# Altium PCB quads.PcbDoc (part 2 of 2)
Units mil, origin at the board's own origin, x right, y up, seen from the top; angles counter-clockwise.
Board outline 3936.87 x 3936.87 mil, 2 copper layers (Top Layer, Bottom Layer); 52 components, 53 nets, 184 pads, 27 vias.
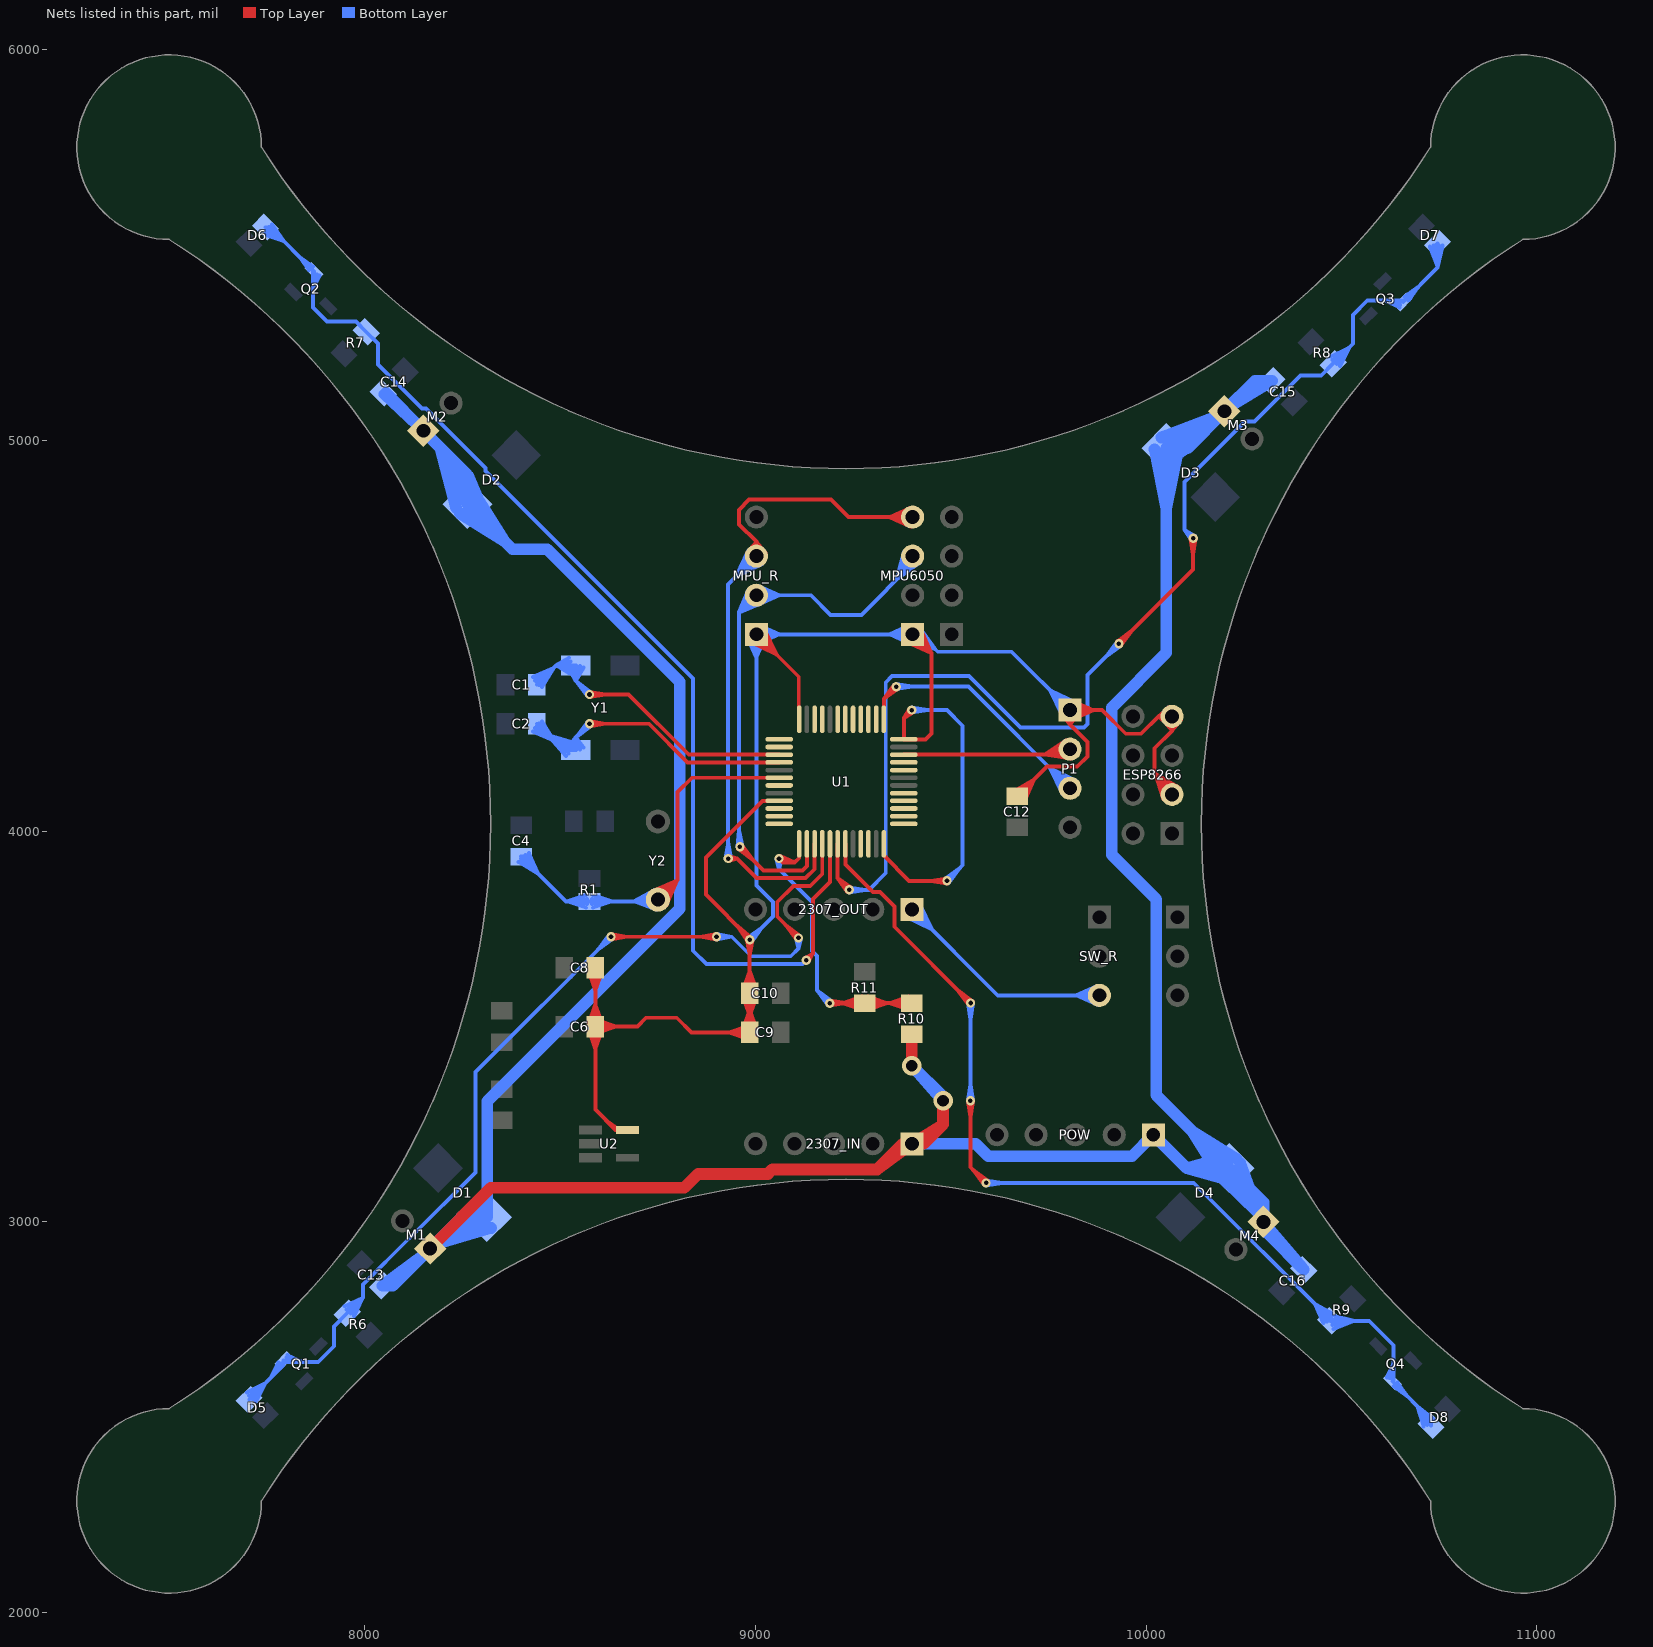
[diagram p2: the nets of this part, all layers, seen from the top]

## Via types
v1: diameter 23.62, hole 11.81, Top Layer to Bottom Layer, 24 vias
v2: diameter 50, hole 30, Top Layer to Bottom Layer, 3 vias

## Nets (pads, with @x,y where several pads share a name; then routed paths per layer and width w, separated by ;. In a path a pad name is that pad's centre, name@x,y a point inside that pad or via, vN(x,y) a via of type N, cw(c..) or ccw(c..) an arc to the next point about the centre after c; other vN are vias at no path point) (continued)
OSCOUT: C4.2 R1.1 U1.6 Y2.1 | length 2633.6
  Top Layer w10: Y2.1@8735.31,3846.45 8800,3875 ; Y2.1@8740.04,3837.52 8800,3875 ; Y2.1@8745.94,3829.42 8800,3875 ; Y2.1@8750,3825 8800,3875 ; Y2.1@8754.42,3820.94 8800,3875 ; Y2.1@8762.52,3815.04 8800,3875 ; Y2.1@8771.45,3810.31 8800,3875 ; U1.6@9060.55,4136.84 8836.84,4136.84 8800,4100 8800,3875
  Bottom Layer w10: C4.2@8393.79,3921.57 8443.71,3891.29 ; C4.2@8399.72,3929.68 8443.71,3891.29 ; C4.2@8400,3935 8514.53,3820.47 R1.1@8575,3820.47 8745.47,3820.47 Y2.1@8750,3825 8688.74,3820.47 ; C4.2@8405,3935 8443.71,3891.29 ; C4.2@8410.92,3939.6 8443.71,3891.29 ; C4.2@8419.69,3944.51 8443.71,3891.29 ; R1.1@8566.41,3804.04 8517.44,3820.47 ; R1.1@8566.41,3836.91 8517.44,3820.47 ; R1.1@8568.67,3813.83 8517.44,3820.47 ; R1.1@8568.67,3827.11 8517.44,3820.47 ; R1.1@8569.09,3820.47 8517.44,3820.47 ; R1.1@8580.91,3820.47 8632.56,3820.47 ; R1.1@8581.33,3813.83 8632.56,3820.47 ; R1.1@8581.33,3827.11 8632.56,3820.47 ; R1.1@8583.59,3804.04 8632.56,3820.47 ; R1.1@8583.59,3836.91 8632.56,3820.47 ; Y2.1@8742.64,3849.94 8688.74,3820.47 ; Y2.1@8746.39,3799.25 8688.74,3820.47 ; Y2.1@8746.75,3840.67 8688.74,3820.47 ; Y2.1@8749.09,3809.03 8688.74,3820.47 ; Y2.1@8749.27,3830.95 8688.74,3820.47 ; Y2.1@8750.15,3819 8688.74,3820.47
PA0: U1.10
PA1: U1.11
PA2: U1.12
PA3: R10.1 R11.2 U1.13 | length 1872.7
  Top Layer w10: v1@9058.9,3923.28 9100,3920 ; v1@9062.19,3936.45 9100,3920 ; U1.13@9111.73,3967.55 9111.73,3931.73 9100,3920 ; v1(9190,3560) R11.2@9280,3560 R10.1@9400,3560 ; v1@9190.55,3553.21 9231.81,3560 v1@9190.55,3566.79 ; R11.2@9272.08,3542.74 9222.5,3560 ; R11.2@9272.08,3577.26 9222.5,3560 ; R11.2@9274.46,3552.52 9222.5,3560 ; R11.2@9274.46,3567.48 9222.5,3560 ; R11.2@9275,3560 9222.5,3560 ; R11.2@9285,3560 9337.5,3560 ; R11.2@9285.54,3552.52 9337.5,3560 ; R11.2@9285.54,3567.48 9337.5,3560 ; R11.2@9287.92,3542.74 9337.5,3560 ; R11.2@9287.92,3577.26 9337.5,3560 ; R10.1@9392.08,3542.74 9342.5,3560 ; R10.1@9392.08,3577.26 9342.5,3560 ; R10.1@9394.46,3552.52 9342.5,3560 ; R10.1@9394.46,3567.48 9342.5,3560 ; R10.1@9395,3560 9342.5,3560 ; 9100,3920 9070,3920 v1(9060,3930) 9100,3920
  Bottom Layer w10: v1@9053.24,3929.14 9060,3902.97 ; v1(9060,3930) 9060,3902.97 ; v1@9066.76,3929.14 9060,3902.97 ; v1@9184.85,3555.55 9156.98,3593.03 v1@9194.45,3565.15 ; v1(9190,3560) 9156.81,3593.19 9156.81,3681.11 9144.53,3693.39 9144.53,3818.44 9060,3902.97
PA6: D5.1 Q1.2 R6.2 U1.16 | length 3915.2
  Top Layer w10: v1(8630,3730) v1(8900,3730) 8858.19,3730 ; v1@8630.55,3723.21 8671.81,3730 v1@8630.55,3736.79 ; v1@8899.45,3723.21 8858.19,3730 ; v1@8899.45,3736.79 8858.19,3730 ; v1@9104.85,3722.58 9076.98,3760.05 ; v1@9114.45,3732.18 9076.98,3760.05 ; U1.16@9170.79,3967.55 9170.79,3890.79 9140,3860 9097.03,3860 9055.47,3818.44 9055.47,3781.56 v1(9110,3727.03) 9076.98,3760.05
  Bottom Layer w10: D5.1@7698.57,2563.58 7744.82,2586.58 ; D5.1@7703.9,2555.05 7744.82,2586.58 ; D5.1@7704.12,2545.88 7792.23,2633.99 Q1.2@7792.23,2645.13 7795.4,2641.96 7880.85,2641.96 7920.68,2681.79 7920.68,2732.25 R6.2@7954.72,2766.28 7994.93,2806.5 ; D5.1@7708.3,2550.06 7744.82,2586.58 ; D5.1@7713.29,2545.66 7744.82,2586.58 ; D5.1@7721.82,2540.33 7744.82,2586.58 ; Q1.2@7778.69,2640.9 7759.61,2601.37 ; Q1.2@7784.58,2637.47 7759.61,2601.37 ; Q1.2@7789.86,2633.18 7759.61,2601.37 ; Q1.2@7798.62,2646.09 7838.62,2641.96 ; Q1.2@7799.89,2652.78 7838.62,2641.96 ; Q1.2@7802.27,2659.16 7838.62,2641.96 ; R6.2@7948.14,2784.1 7994.93,2806.5 ; R6.2@7953.35,2775.49 7994.93,2806.5 ; R6.2@7958.25,2769.82 7994.93,2806.5 ; R6.2@7963.92,2764.91 7994.93,2806.5 ; R6.2@7972.54,2759.71 7994.93,2806.5 ; v1@8624.85,3734.45 8596.98,3696.98 ; v1@8634.45,3724.85 8596.98,3696.98 ; v1(8900,3730) 8939.08,3730 ; v1@8900.59,3723.21 8939.08,3730 ; v1@8900.59,3736.79 8939.08,3730 ; v1@9103.24,3726.17 9110,3700 ; v1@9116.76,3726.17 9110,3700 ; 7994.93,2806.5 7994.93,2839.39 8113.72,2958.18 8114.73,2958.18 8283.33,3126.77 8283.33,3383.33 v1(8630,3730) 8596.98,3696.98 ; 8939.08,3730 8989.08,3680 9090,3680 9110,3700 ; 9110,3700 v1(9110,3727.03) 9110,3700
PA7: D6.1 Q2.2 R7.2 U1.17 | length 3554.7
  Top Layer w10: v1@9125.91,3675.45 9147,3687 ; v1(9130,3670) 9147,3687 ; v1@9135.45,3665.91 9147,3687 ; U1.17@9190.47,3967.55 9190.47,3870.47 9147,3827 9147,3687
  Bottom Layer w10: D6.1@7742.36,5526.94 7792.9,5509.99 ; D6.1@7745.88,5545.88 7757.01,5545.88 Q2.2@7870.13,5432.77 7866.96,5429.6 7866.96,5340.61 7903.25,5304.32 7977.25,5304.32 R7.2@8003.28,5278.28 8033.64,5247.93 8033.64,5194.9 8146.78,5081.76 8156.21,5081.76 8308.61,4929.36 8308.61,4922.43 8840,4391.04 8840,4381 8840,4379 8840,3694 8874,3660 9120,3660 v1(9130,3670) ; D6.1@7746.44,5536.12 7792.9,5509.99 ; D6.1@7750.06,5541.7 7792.9,5509.99 ; D6.1@7754.34,5546.79 7792.9,5509.99 ; D6.1@7761.93,5553.38 7792.9,5509.99 ; Q2.2@7857.28,5436.01 7832.91,5469.99 ; Q2.2@7862.47,5440.42 7832.91,5469.99 ; Q2.2@7866.88,5445.61 7832.91,5469.99 ; Q2.2@7871.09,5426.38 7866.96,5386.36 ; Q2.2@7877.78,5425.11 7866.96,5386.36 ; Q2.2@7884.17,5422.73 7866.96,5386.36
PA8: U1.29
PA11: U1.32
PA12: U1.33
PA15: U1.38
PB0: D7.1 Q3.2 R8.2 U1.18 | length 4446.4
  Top Layer w10: U1.18@9210.16,3967.55 9210.16,3879.84 9210.47,3879.53 ; v1@9234.81,3845.59 9210.47,3879.53 ; v1@9244.41,3855.19 9210.47,3879.53 ; v1@9925.55,4485.15 9963.02,4513.02 v1@9935.15,4475.55 ; v1(9930,4480) 10120,4670 v1(10120,4750) ; v1@10113.21,4749.45 10120,4708.19 v1@10126.79,4749.45 ; 9210.47,3879.53 v1(9240,3850) 9210.47,3879.53
  Bottom Layer w10: v1(9240,3850) 9290,3850 9333.19,3893.19 9333.19,4381.11 9348.89,4396.81 9546.47,4396.81 9677.81,4265.47 9840.74,4265.47 9849.53,4274.26 9849.53,4399.53 v1(9930,4480) 9896.98,4446.98 ; v1@9240.55,3843.21 9281.81,3850 v1@9240.55,3856.79 ; v1@9924.85,4484.45 9896.98,4446.98 ; v1@9934.45,4474.85 9896.98,4446.98 ; v1@10114.69,4745.73 10097.61,4772.39 ; v1@10124.27,4755.31 10097.61,4772.39 ; R8.2@10471.68,5214.52 10518.94,5237.37 ; R8.2@10476.91,5205.92 10518.94,5237.37 ; R8.2@10481.82,5200.25 10518.94,5237.37 ; R8.2@10487.49,5195.34 10518.94,5237.37 ; R8.2@10496.08,5190.11 10518.94,5237.37 ; Q3.2@10647.73,5340.83 10611.36,5358.04 ; Q3.2@10650.11,5347.22 10611.36,5358.04 ; Q3.2@10651.38,5353.91 10611.36,5358.04 ; Q3.2@10661.01,5367.72 10694.99,5392.09 ; Q3.2@10665.42,5362.53 10694.99,5392.09 ; Q3.2@10670.61,5358.12 10694.99,5392.09 ; D7.1@10725.46,5496.29 10745.88,5443.5 ; D7.1@10735.11,5499.06 10745.88,5443.5 ; D7.1@10741.7,5499.94 10745.88,5443.5 ; D7.1@10745.88,5504.12 10745.88,5442.99 Q3.2@10657.77,5354.87 10654.6,5358.04 10565.61,5358.04 10529.32,5321.75 10529.32,5247.75 R8.2@10478.28,5196.72 10447.93,5166.36 10394.9,5166.36 10277.35,5048.82 10252.27,5048.82 10097.61,4894.16 10097.61,4772.39 ; D7.1@10748.36,5500.04 10745.88,5443.5 ; D7.1@10758.31,5498.72 10745.88,5443.5 ; 10097.61,4772.39 v1(10120,4750) 10097.61,4772.39
PB1: D8.1 Q4.2 R9.2 U1.19 | length 4258.4
  Top Layer w10: U1.19@9229.84,3967.55 9229.84,3915.16 9300.47,3844.53 9318.44,3844.53 9355.47,3807.5 9355.47,3755.47 v1(9550.47,3560.47) ; v1@9543.21,3309.45 9550,3268.19 ; v1@9545.32,3556.02 9517.45,3593.5 v1@9554.92,3565.63 ; v1@9556.79,3309.45 9550,3268.19 ; v1@9584.85,3095.55 9556.98,3133.02 ; v1@9594.45,3105.15 9556.98,3133.02 ; 9550,3268.19 v1(9550,3310) 9550,3150 9550,3140 v1(9590,3100) 9556.98,3133.02
  Bottom Layer w10: v1@9543.22,3310.63 9550.47,3351.82 ; v1@9543.68,3559.92 9550.47,3518.66 ; v1@9556.79,3310.48 9550.47,3351.82 ; v1@9557.26,3559.92 9550.47,3518.66 ; v1(9590,3100) 10121.55,3100 10471.72,2749.84 R9.2@10471.72,2746.72 10570.71,2746.72 10633.04,2684.39 10633.04,2595.4 Q4.2@10629.87,2592.23 10729.12,2492.99 D8.1@10729.12,2479.12 ; v1@9590.55,3093.21 9631.81,3100 v1@9590.55,3106.79 ; R9.2@10453.51,2740.71 10432.56,2789 ; R9.2@10462.31,2745.58 10432.56,2789 ; R9.2@10468.18,2750.25 10432.56,2789 ; R9.2@10473.33,2755.71 10432.56,2789 ; R9.2@10475.25,2743.18 10533.54,2746.72 ; R9.2@10475.28,2750.68 10533.54,2746.72 ; R9.2@10476.19,2735.74 10533.54,2746.72 ; R9.2@10476.82,2760.61 10533.54,2746.72 ; R9.2@10478.92,2726.07 10533.54,2746.72 ; R9.2@10478.91,2764.07 10432.56,2789 ; Q4.2@10615.83,2602.27 10633.04,2638.64 ; Q4.2@10622.22,2599.89 10633.04,2638.64 ; Q4.2@10628.91,2598.62 10633.04,2638.64 ; Q4.2@10633.12,2579.39 10667.09,2555.01 ; Q4.2@10637.53,2584.58 10667.09,2555.01 ; Q4.2@10642.72,2588.99 10667.09,2555.01 ; D8.1@10709.95,2476.06 10694.14,2527.97 ; D8.1@10719.25,2479.86 10694.14,2527.97 ; D8.1@10724.94,2483.3 10694.14,2527.97 ; D8.1@10730.18,2487.4 10694.14,2527.97 ; D8.1@10737.04,2494.74 10694.14,2527.97 ; 9550.47,3351.82 v1(9550,3310) 9550.47,3310.47 v1(9550.47,3560.47) 9550.47,3518.66
PB3: U1.39
PB4: U1.40
PB5: U1.41
PB6: U1.42
PB7: U1.43
PB8: U1.45
PB9: U1.46
PB10: U1.21
PB11: U1.22
PB12: U1.25
PB13: U1.26
PB14: U1.27
PB15: U1.28
PC13: U1.2
PC14: C1.2 U1.3 Y1.2 | length 1665.3
  Top Layer w10: v1(8575,4350) 8675,4350 8829.1,4195.9 U1.3@9060.55,4195.9 ; v1@8575.55,4343.21 8616.81,4350 v1@8575.55,4356.79
  Bottom Layer w10: C1.2@8430.49,4394.69 8483.71,4418.71 ; C1.2@8435.4,4385.92 8483.71,4418.71 ; C1.2@8440,4375 8489.27,4424.27 ; C1.2@8440,4380 8483.71,4418.71 ; C1.2@8445.32,4374.72 8483.71,4418.71 ; C1.2@8453.43,4368.79 8483.71,4418.71 ; Y1.2@8520.14,4418.87 8540.01,4384.99 ; Y1.2@8522.75,4404.41 8489.27,4424.27 ; Y1.2@8522.75,4444.13 8489.27,4424.27 ; Y1.2@8526.75,4413.78 8489.27,4424.27 ; Y1.2@8526.75,4434.76 8489.27,4424.27 ; Y1.2@8528.19,4424.27 8489.27,4424.27 ; Y1.2@8529.51,4422.84 8540.01,4384.99 ; Y1.2@8550.5,4422.84 8540.01,4384.99 ; Y1.2@8559.88,4418.87 8540.01,4384.99 ; v1@8569.85,4345.55 8541.98,4383.02 ; v1@8579.45,4355.15 8541.98,4383.02 ; 8489.27,4424.27 Y1.2@8540.01,4424.27 ; 8540.01,4384.99 Y1.2@8540.01,4424.27 ; 8540.01,4384.99 v1(8575,4350) 8541.98,4383.02 ; 8540.01,4384.99 Y1.2@8540.01,4424.27
PC15: C2.2 U1.4 Y1.1 | length 1693.8
  Top Layer w10: v1(8575,4275) 8727.42,4275 8826.21,4176.21 U1.4@9060.55,4176.21 ; v1@8575.55,4268.21 8616.81,4275 v1@8575.55,4281.79
  Bottom Layer w10: C2.2@8430.49,4255.31 8483.71,4231.29 ; C2.2@8435.4,4264.08 8483.71,4231.29 ; C2.2@8440,4270 8483.71,4231.29 ; C2.2@8440,4275 8507.27,4207.73 Y1.1@8540.01,4207.73 8540.01,4240.01 ; C2.2@8445.32,4275.28 8483.71,4231.29 ; C2.2@8453.43,4281.21 8483.71,4231.29 ; Y1.1@8514.59,4192.27 8467.96,4247.04 ; Y1.1@8520.49,4214.3 8540.01,4240.01 ; Y1.1@8521.77,4199.31 8467.96,4247.04 ; Y1.1@8528.2,4207.73 8467.96,4247.04 ; Y1.1@8529.56,4209.47 8540.01,4240.01 ; Y1.1@8533.32,4217 8467.96,4247.04 ; Y1.1@8536.87,4226.41 8467.96,4247.04 ; Y1.1@8550.45,4209.47 8540.01,4240.01 ; Y1.1@8559.52,4214.3 8540.01,4240.01 ; v1@8569.85,4279.45 8541.98,4241.98 v1@8579.45,4269.85 ; v1(8575,4275) 8540.01,4240.01
RESET: U1.7
SCL: MPU6050.3 MPU_R.2 U1.14 | length 2487.1
  Top Layer w10: v1@8955.55,3954.85 8993.02,3926.98 v1@8965.15,3964.45 ; v1(8960,3960) 9020,3900 9120,3900 9131.42,3911.42 U1.14@9131.42,3967.55
  Bottom Layer w10: v1@8953.19,3960.14 8957.47,4002.14 ; v1@8966.74,3960.95 8957.47,4002.14 ; MPU_R.2@8981.61,4617.63 8957.47,4559.47 ; MPU_R.2@8990.61,4613.02 8957.47,4559.47 ; MPU_R.2@9003.77,4589.58 9061.53,4604 ; MPU_R.2@9003.77,4618.42 9061.53,4604 ; MPU_R.2@9007.05,4580 9061.53,4604 ; MPU_R.2@9007.05,4628 9061.53,4604 ; MPU_R.2@9011.02,4592.61 8957.47,4559.47 ; MPU_R.2@9015.63,4583.61 8957.47,4559.47 ; MPU6050.3@9379.72,4714.25 9361.01,4644.21 ; MPU6050.3@9389.26,4710.97 9361.01,4644.21 ; MPU6050.3@9413.1,4694.63 9361.01,4644.21 ; MPU6050.3@9419.59,4686.91 9361.01,4644.21 ; 8957.47,4002.14 v1(8960,3960) 8957.47,3962.53 8957.47,4559.47 ; 8957.47,4559.47 MPU_R.2@9002,4604 9142.2,4604 9192.33,4553.87 9270.67,4553.87 9402,4685.2 MPU6050.3@9402,4704 9361.01,4644.21
SDA: MPU6050.4 MPU_R.3 U1.15 | length 2531.8
  Top Layer w10: v1(8930,3930) 8952.08,3930 ; v1@8931.05,3923.27 8952.08,3930 ; v1@8931.05,3936.73 8952.08,3930 ; MPU_R.3@8978.86,4712.12 9002,4741.03 ; MPU_R.3@8987.75,4706.85 9002,4741.03 ; MPU_R.3@9002,4704 9002,4741.03 ; MPU_R.3@9016.25,4706.85 9002,4741.03 ; MPU_R.3@9025.14,4712.12 9002,4741.03 ; U1.15@9151.1,3967.55 9151.1,3903.45 9151.42,3903.13 9128.28,3880 9002.08,3880 8952.08,3930 ; MPU6050.4@9396.95,4780 9342.47,4804 ; MPU6050.4@9396.95,4828 9342.47,4804 ; MPU6050.4@9400.23,4789.58 9342.47,4804 ; MPU6050.4@9400.23,4818.42 9342.47,4804 ; MPU6050.4@9402,4804 9237.92,4804 9193.4,4848.53 8983.56,4848.53 8957.47,4822.44 8957.47,4785.56 9002,4741.03
  Bottom Layer w10: v1@8923.21,3930.55 8930,3971.81 v1@8936.79,3930.55 ; v1(8930,3930) 8930,4632 MPU_R.3@9002,4704 ; MPU_R.3@8981.95,4718.12 8951.26,4653.26 ; MPU_R.3@8990.74,4713.18 8951.26,4653.26 ; MPU_R.3@9011.18,4692.74 8951.26,4653.26 ; MPU_R.3@9016.12,4683.95 8951.26,4653.26
SW: 2307_OUT.1 SW_R.3 | length 1096.3
  Bottom Layer w10: 2307_OUT.1@9385.88,3779.95 9450.74,3749.26 ; 2307_OUT.1@9390.82,3788.74 9450.74,3749.26 ; 2307_OUT.1@9400,3800 9620,3580 SW_R.3@9880,3580 ; 2307_OUT.1@9411.26,3809.18 9450.74,3749.26 ; 2307_OUT.1@9420.05,3814.12 9450.74,3749.26 ; SW_R.3@9874.95,3556 9820.47,3580 ; SW_R.3@9874.95,3604 9820.47,3580 ; SW_R.3@9878.23,3565.58 9820.47,3580 ; SW_R.3@9878.23,3594.42 9820.47,3580
SWCLK: P1.3 U1.37 | length 1154.7
  Top Layer w10: U1.37@9328.27,4286.45 9328.27,4338.27 ; v1@9354.83,4374.44 9328.27,4338.27 ; v1@9364.44,4364.83 9328.27,4338.27 ; 9328.27,4338.27 v1(9360,4370) 9328.27,4338.27
  Bottom Layer w10: v1(9360,4370) 9545,4370 P1.3@9805,4110 ; v1@9360.55,4363.21 9401.81,4370 v1@9360.55,4376.79 ; P1.3@9784.95,4095.88 9754.26,4160.74 ; P1.3@9793.74,4100.82 9754.26,4160.74 ; P1.3@9814.18,4121.26 9754.26,4160.74 ; P1.3@9819.12,4130.05 9754.26,4160.74
SWIO: P1.2 U1.34 | length 760.8
  Top Layer w10: U1.34@9379.45,4195.9 9790.9,4195.9 P1.2@9805,4210 9740.65,4195.9 ; P1.2@9795.38,4232.56 9740.65,4195.9 ; P1.2@9800.34,4223.76 9740.65,4195.9 ; P1.2@9805.7,4185.48 9740.65,4195.9 ; P1.2@9806.53,4195.55 9740.65,4195.9
VBAT: U1.1
VCC3V3: C6.2 C8.2 C9.2 C10.2 C12.2 ESP8266.3 ESP8266.7 MPU6050.1 MPU_R.1 P1.1 U1.9 U1.24 U1.36 U1.48 U2.5 | length 11797.7
  Top Layer w10: C6.2@8572.74,3492.08 8590,3442.5 ; C6.2@8572.74,3507.92 8590,3557.5 ; C8.2@8572.74,3642.08 8590,3592.5 ; C6.2@8582.52,3494.46 8590,3442.5 ; C6.2@8582.52,3505.54 8590,3557.5 ; C8.2@8582.52,3644.46 8590,3592.5 ; C6.2@8590,3495 8590,3442.5 ; C6.2@8590,3505 8590,3557.5 ; C8.2@8590,3645 8590,3592.5 ; C8.2@8590,3650 C6.2@8590,3500 ; C6.2@8590.54,3492.52 8642.5,3500 ; C6.2@8590.54,3507.48 8642.5,3500 ; C6.2@8592.92,3482.74 8642.5,3500 ; C6.2@8592.92,3517.26 8642.5,3500 ; C6.2@8597.48,3494.46 8590,3442.5 ; C6.2@8597.48,3505.54 8590,3557.5 ; C8.2@8597.48,3644.46 8590,3592.5 ; C6.2@8607.26,3492.08 8590,3442.5 ; C6.2@8607.26,3507.92 8590,3557.5 ; C8.2@8607.26,3642.08 8590,3592.5 ; 8618.21,3259.17 U2.5@8652.56,3235.43 ; U2.5@8672.24,3235.43 8641.94,3235.43 ; C9.2@8967.74,3492.92 8985,3542.5 ; C10.2@8967.74,3577.08 8985,3527.5 ; C10.2@8967.74,3592.92 8985,3642.5 ; C9.2@8977.52,3490.54 8985,3542.5 ; C10.2@8977.52,3579.46 8985,3527.5 ; C10.2@8977.52,3590.54 8985,3642.5 ; v1@8978.21,3721.45 8985,3680.19 ; v1@8979.59,3717.86 8953.99,3756.96 ; C9.2@8982.08,3467.74 8932.5,3485 ; C9.2@8982.08,3502.26 8932.5,3485 ; C9.2@8984.46,3477.52 8932.5,3485 ; C9.2@8984.46,3492.48 8932.5,3485 ; C9.2@8985,3490 8985,3542.5 ; C10.2@8985,3580 8985,3527.5 ; C10.2@8985,3590 8985,3642.5 ; MPU_R.1@8987.88,4483.95 9052.74,4453.26 ; v1@8989.75,3726.88 8953.99,3756.96 ; v1@8991.79,3721.45 8985,3680.19 ; C9.2@8992.48,3490.54 8985,3542.5 ; C10.2@8992.48,3579.46 8985,3527.5 ; C10.2@8992.48,3590.54 8985,3642.5 ; MPU_R.1@8992.82,4492.74 9052.74,4453.26 ; MPU_R.1@9002,4504 9110.51,4395.49 9110.51,4286.45 U1.48@9111.73,4286.45 ; C9.2@9002.26,3492.92 8985,3542.5 ; C10.2@9002.26,3577.08 8985,3527.5 ; C10.2@9002.26,3592.92 8985,3642.5 ; MPU_R.1@9013.26,4513.18 9052.74,4453.26 ; MPU_R.1@9022.05,4518.12 9052.74,4453.26 ; U1.9@9060.55,4077.79 9017.79,4077.79 8873.19,3933.19 8873.19,3837.76 8985,3725.94 v1(8985,3722) ; U1.24@9328.27,3967.55 9328.27,3937.73 9393,3873 v1(9490,3873) ; MPU6050.1@9388.08,4483.81 9450,4456 ; MPU6050.1@9392.89,4492.69 9450,4456 ; v1@9394.65,4314.22 9379.45,4289.45 ; v1(9400,4310) 9379.45,4289.45 ; MPU6050.1@9402,4504 9450,4456 ; v1@9404.22,4304.65 9379.45,4289.45 ; MPU6050.1@9413.31,4513.11 9450,4456 ; MPU6050.1@9422.19,4517.92 9450,4456 ; v1@9489.45,3866.21 9448.19,3873 v1@9489.45,3879.79 ; C12.2@9663.79,4103.43 9713.71,4133.71 ; C12.2@9669.72,4095.32 9713.71,4133.71 ; C12.2@9670,4090 9745.47,4165.47 9823.44,4165.47 9849.53,4191.56 9849.53,4228.44 9805,4272.97 ; C12.2@9675,4090 9713.71,4133.71 ; C12.2@9680.92,4085.4 9713.71,4133.71 ; C12.2@9689.69,4080.49 9713.71,4133.71 ; P1.1@9781.86,4301.88 9805,4272.97 ; P1.1@9790.75,4307.15 9805,4272.97 ; P1.1@9806.77,4295.58 9864.53,4310 ; P1.1@9806.77,4324.42 9864.53,4310 ; P1.1@9810.05,4286 9864.53,4310 ; P1.1@9810.05,4334 9864.53,4310 ; P1.1@9819.25,4307.15 9805,4272.97 ; P1.1@9828.14,4301.88 9805,4272.97 ; ESP8266.7@10042.86,4285.88 10066,4256.97 ; ESP8266.3@10044.37,4082.43 10023.49,4147.45 ; ESP8266.7@10051.75,4291.15 10066,4256.97 ; ESP8266.3@10053.73,4086.22 10023.49,4147.45 ; ESP8266.7@10057.33,4271.06 10031.31,4294 ; ESP8266.7@10057.33,4316.94 10031.31,4294 ; ESP8266.7@10062.96,4279.79 10031.31,4294 ; ESP8266.7@10062.96,4308.21 10031.31,4294 ; ESP8266.3@10076.34,4104.2 10023.49,4147.45 ; ESP8266.7@10080.25,4291.15 10066,4256.97 ; ESP8266.3@10082.14,4112.47 10023.49,4147.45 ; ESP8266.7@10089.14,4285.88 10066,4256.97 ; C6.2@8590,3500 8590,3287.38 8641.94,3235.43 ; C6.2@8590,3500 8697.39,3500 8719.89,3522.5 8798.23,3522.5 8835.73,3485 C9.2@8985,3485 C10.2@8985,3585 v1(8985,3722) ; 8641.94,3235.43 U2.5@8652.56,3235.43 ; 8641.94,3235.43 U2.5@8652.56,3235.43 ; 8953.99,3756.96 v1(8985,3722) ; 8985,3680.19 v1(8985,3722) ; 9379.45,4289.45 U1.36@9379.45,4235.27 9435.27,4235.27 9450,4250 9450,4456 ; 9805,4272.97 P1.1@9805,4310 9887.03,4310 9947.56,4249.47 9986.79,4249.47 10031.31,4294 ; 10023.49,4147.45 ESP8266.3@10066,4094 10066,4104.94 10021.47,4149.47 10021.47,4212.44 10066,4256.97 ; 10031.31,4294 ESP8266.7@10066,4294 ; 10031.31,4294 ESP8266.7@10066,4294 ; 10066,4256.97 ESP8266.7@10066,4294 ; 10066,4256.97 ESP8266.7@10066,4294
  Bottom Layer w10: MPU_R.1@8978,4498.95 9002,4444.47 ; v1@8980.55,3727.15 9018.02,3755.02 v1@8990.15,3717.55 ; v1(8985,3722) 9044.53,3781.53 9044.53,3818.44 9002,3860.97 MPU_R.1@9002,4504 MPU6050.1@9402,4504 ; MPU_R.1@8987.58,4502.23 9002,4444.47 ; MPU_R.1@9003.77,4489.58 9061.53,4504 ; MPU_R.1@9003.77,4518.42 9061.53,4504 ; MPU_R.1@9007.05,4480 9061.53,4504 ; MPU_R.1@9007.05,4528 9061.53,4504 ; MPU_R.1@9016.42,4502.23 9002,4444.47 ; MPU_R.1@9026,4498.95 9002,4444.47 ; MPU6050.1@9392.5,4481.39 9458.99,4466.75 ; MPU6050.1@9395.39,4491.06 9458.99,4466.75 ; MPU6050.1@9396.95,4480 9342.47,4504 ; MPU6050.1@9396.95,4528 9342.47,4504 ; v1(9400,4310) 9490,4310 9530,4270 9530,3913 v1(9490,3873) ; MPU6050.1@9400.23,4489.58 9342.47,4504 ; MPU6050.1@9400.23,4518.42 9342.47,4504 ; v1@9400.55,4303.21 9441.81,4310 v1@9400.55,4316.79 ; MPU6050.1@9411.2,4515.24 9458.99,4466.75 ; MPU6050.1@9418.9,4521.78 9458.99,4466.75 ; v1@9485.55,3878.15 9523.02,3906.02 v1@9495.15,3868.55 ; P1.1@9784.95,4295.88 9754.26,4360.74 ; P1.1@9793.74,4300.82 9754.26,4360.74 ; P1.1@9814.18,4321.26 9754.26,4360.74 ; P1.1@9819.12,4330.05 9754.26,4360.74 ; MPU6050.1@9402,4504 9421.73,4504 9466.26,4459.47 9655.53,4459.47 P1.1@9805,4310 9754.26,4360.74 ; MPU6050.1@9402,4504 9458.99,4466.75
VCC7V4: 2307_IN.1 C13.1 C14.1 C15.1 C16.1 D1.2 D2.2 D3.2 D4.2 M1.1 M2.1 M3.1 M4.1 POW.1 R10.2 | length 15236.4
  Top Layer w30: M1.1@8167,2932 8322.16,3087.16 8817.57,3087.16 8853.31,3122.91 9031.6,3122.91 9043.16,3134.47 9311.58,3134.47 ; v2@9480,3320 v2(9480,3310) ; 9311.58,3134.47 9377.11,3200 2307_IN.1@9400,3200 ; 9311.58,3134.47 2307_IN.1@9400,3200 ; 2307_IN.1@9400,3200 9430,3200 ; 2307_IN.1@9400,3200 9480,3250 ; 2307_IN.1@9400,3200 9430,3200 ; 9430,3200 9480,3250 ; 9480,3250 v2(9480,3310) ; 9480,3250 v2(9480,3310) ; v2(9400,3400) R10.2@9400,3480 v2(9400,3400)
  Bottom Layer w10: C14.1@8046.72,5121.72 C14.1@8053.28,5121.72
  Bottom Layer w30: C13.1@8045.28,2836.72 8071.72,2836.72 M1.1@8167,2932 ; C14.1@8053.28,5121.72 M2.1@8150,5025 ; C14.1@8065.48,5109.52 M2.1@8150,5025 ; M2.1@8133.3,5041.7 8050.25,5118.18 M2.1@8133.89,5041.11 ; 8144.41,2909.41 C13.1@8048.82,2840.25 ; M1.1@8147.86,2912.86 C13.1@8048.82,2840.25 ; D2.2@8233.96,4826.88 8192.76,4982.24 ; D2.2@8243.49,4813.69 8358.02,4741.71 D2.2@8286.03,4856.24 ; D2.2@8288.3,4852.99 8192.76,4982.24 ; D1.2@8296.09,3037.72 M1.1@8176.71,2941.71 ; D1.2@8323.88,2984.25 M1.1@8176.71,2941.71 ; 2307_IN.1@9400,3200 9563.89,3200 9595.41,3168.47 9963.47,3168.47 ; D3.2@10021.24,4977.66 10051.36,4826.61 ; D3.2@10038.12,5007.86 M3.1@10189.85,5064.85 ; D3.2@10038.97,5008.26 M3.1@10179.88,5054.88 ; D3.2@10053.88,5010.81 10115.48,4990.48 ; D3.2@10062.82,4952.61 10115.48,4990.48 ; D3.2@10069.1,4956.1 M3.1@10179.88,5054.88 ; D3.2@10069.44,4956.35 M3.1@10189.85,5064.85 ; D3.2@10081.49,4977.66 10051.36,4826.61 ; D4.2@10188.97,3118.76 10116.98,3233.29 ; D4.2@10189.18,3118.49 M4.1@10287.14,3022.41 ; D4.2@10208.44,3107.65 10103.36,3137.64 ; D4.2@10208.44,3167.62 10103.36,3137.64 ; M3.1@10210.2,5085.2 C15.1@10318.18,5149.75 ; D4.2@10231.51,3161.31 10116.98,3233.29 ; D4.2@10232.26,3118.02 M4.1@10300,3000 ; D4.2@10239.72,3151.17 M4.1@10287.14,3022.41 ; M4.1@10315.15,2981.25 10399.75,2881.82 10320.2,2961.37 ; C15.1@10321.72,5153.28 10278.28,5153.28 ; 10377.51,2904.06 M4.1@10300,3000 ; C16.1@10403.28,2878.28 10300,2981.57 M4.1@10300,3000 ; C13.1@8048.82,2840.25 8082.48,2847.48 M1.1@8167,2932 ; M2.1@8150,5025 8262.36,4912.64 ; M1.1@8167,2932 8247.36,3012.36 ; M1.1@8176.71,2941.71 D1.2@8312.64,3012.36 ; 8192.76,4982.24 D2.2@8262.36,4837.36 ; 8247.36,3012.36 D1.2@8312.64,3012.36 ; 8247.36,3012.36 8305.61,2982.91 8247.36,3012.36 ; 8247.36,3012.36 8305.61,3041.81 8247.36,3012.36 ; 8247.36,3012.36 D1.2@8312.64,3012.36 ; 8247.36,3012.36 D1.2@8312.64,3012.36 ; D2.2@8262.36,4837.36 8377.97,4721.75 8466.86,4721.75 8806,4382.61 8806,3801.8 8313.33,3309.13 8313.33,3013.05 D1.2@8312.64,3012.36 ; D2.2@8262.36,4837.36 8262.36,4912.64 ; D2.2@8262.36,4837.36 8262.36,4912.64 ; 8262.36,4912.64 8232.71,4843.45 8262.36,4912.64 ; 8262.36,4912.64 8292.02,4843.45 8262.36,4912.64 ; 9963.47,3168.47 POW.1@10018,3223 ; 9963.47,3168.47 POW.1@10018,3223 ; POW.1@10018,3223 10103.36,3137.64 ; 10051.36,4826.61 D3.2@10051.36,4980.64 ; D3.2@10051.36,4980.64 10051.36,4456.48 9911.47,4316.59 9911.47,3939.47 10025.47,3825.47 10025.47,3324.8 D4.2@10212.64,3137.64 ; D3.2@10051.36,4980.64 10105.64,4980.64 M3.1@10200,5075 ; D3.2@10051.36,4980.64 M3.1@10189.85,5064.85 ; D3.2@10051.36,4980.64 M3.1@10179.88,5054.88 ; D3.2@10051.36,4980.64 10115.48,4990.48 ; 10103.36,3137.64 D4.2@10212.64,3137.64 ; 10103.36,3137.64 D4.2@10212.64,3137.64 ; 10115.48,4990.48 M3.1@10200,5075 ; 10116.98,3233.29 D4.2@10212.64,3137.64 ; M3.1@10200,5075 10278.28,5153.28 ; D4.2@10212.64,3137.64 10300,3050.27 ; D4.2@10212.64,3137.64 M4.1@10287.14,3022.41 ; 10278.28,5153.28 C15.1@10318.18,5149.75 ; 10278.28,5153.28 C15.1@10318.18,5149.75 ; M4.1@10300,3000 10300,3050.27 ; M4.1@10300,3000 10300,3050.27 ; v2(9400,3400) 9480,3320 v2(9480,3310) v2(9400,3400)
pads on no net: 2307_IN.2 2307_IN.3 2307_IN.4 2307_OUT.2 2307_OUT.3 2307_OUT.4 ESP8266.4 ESP8266.5 ESP8266.6 MPU_L.1 MPU_L.2 MPU_L.3 MPU_L.4 POW.3 SW_L.1 SW_L.2 SW_L.3 SW_R.1 Y1.3 Y1.4

## Polygon pours and split planes (outlines as drawn)
GND on Top Layer "Bottom Layer-No Net" (solid, pour order 4): 11200,5987 7263,5987 7263,2050 11200,2050
GND on Bottom Layer "Bottom Layer-No Net" (solid, pour order 6): 11200,2050 7263,2050 7263,5980 7270,5987 11200,5987

## Keep-outs
Keep-Out Layer:
  circle w0.01: c9231.5,4648.42 r78.74
  circle w0.01: c9231.5,3388.58 r78.74
  circle w0.01: c9703.94,3427.95 r78.74
  circle w0.01: c9703.94,4609.05 r78.74
  circle w0.01: c8759.06,4609.05 r78.74
  circle w0.01: c8759.06,3427.95 r78.74
  circle w0.01: c10963.78,5750.78 r167.32
  circle w0.01: c10963.78,2286.22 r167.32
  circle w0.01: c7499.22,5750.78 r167.32
  circle w0.01: c7499.22,2286.22 r167.32
  lines w0.01: 7263,2050 11200,2050 11200,5987 7263,5987 7263,2050 ; 7499.22,2522.44 ccw(c6550.25,4018.5) 7499.22,5514.56 cw(c7499.22,5750.78) 7735.44,5750.78 ccw(c9231.5,6699.75) 10727.56,5750.78 cw(c10963.78,5750.78) 10963.78,5514.56 ccw(c11912.75,4018.5) 10963.78,2522.44 cw(c10963.78,2286.22) 10727.56,2286.22 ccw(c9231.5,1337.25) 7735.44,2286.22 cw(c7499.22,2286.22) 7499.22,2522.44

## Silkscreen, mask and mechanical layers (free items; w line width, h text height)
Top Overlay:
  text "G627-河王" at 8440,4780 h240 r270

## Text inside footprints (layer, text, board x,y; h text height)
ESP8266: Top Overlay "2" at 9986,3894 h60 r90; Top Overlay "1" at 10086,3914 h60 r90; Top Overlay "7" at 10086,4354 h60 r90; Top Overlay "8" at 9986,4354 h60 r90